# EAGLE board RF_PA (EAGLE 9.6.2)
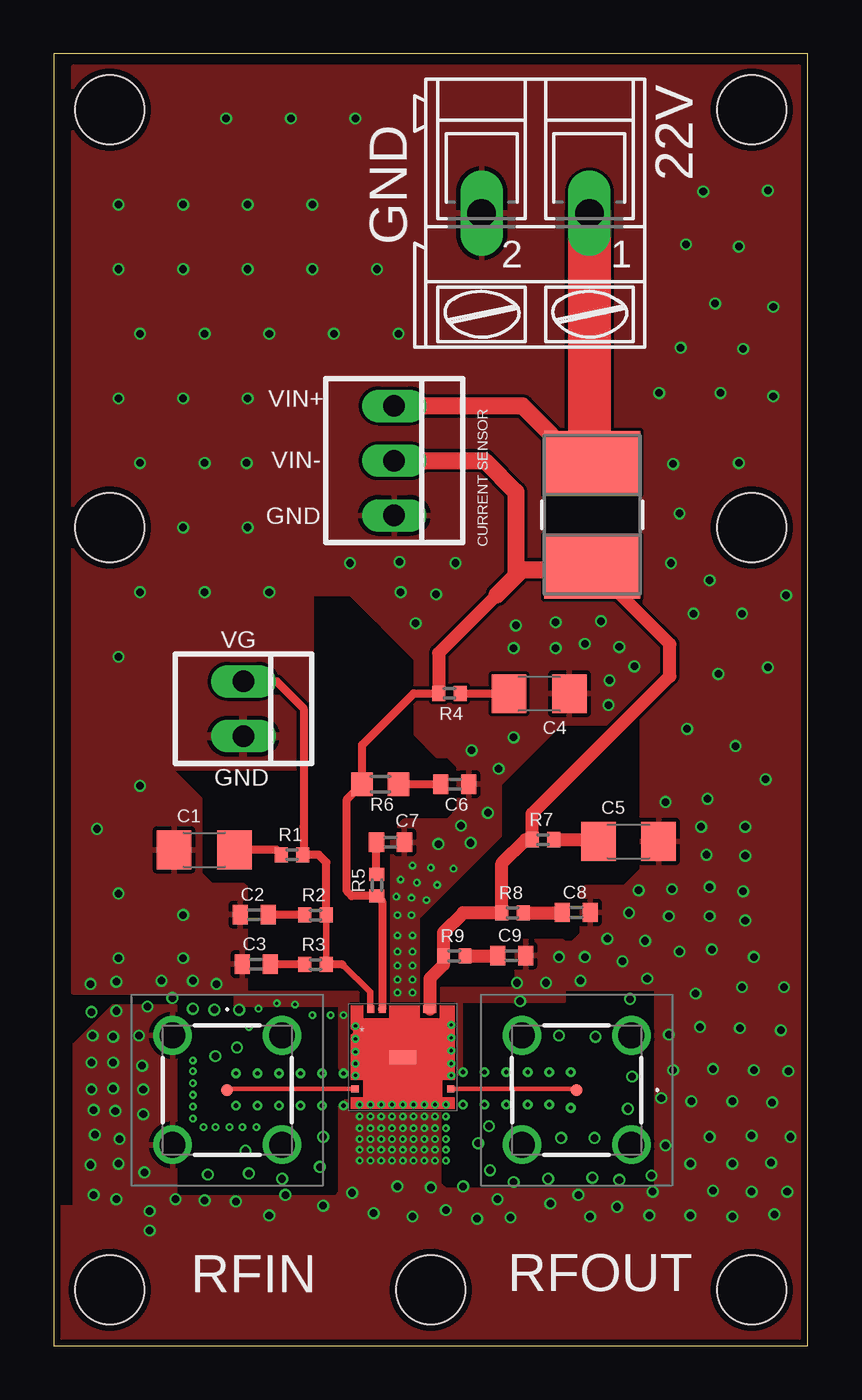
[diagram p0: board, top side]
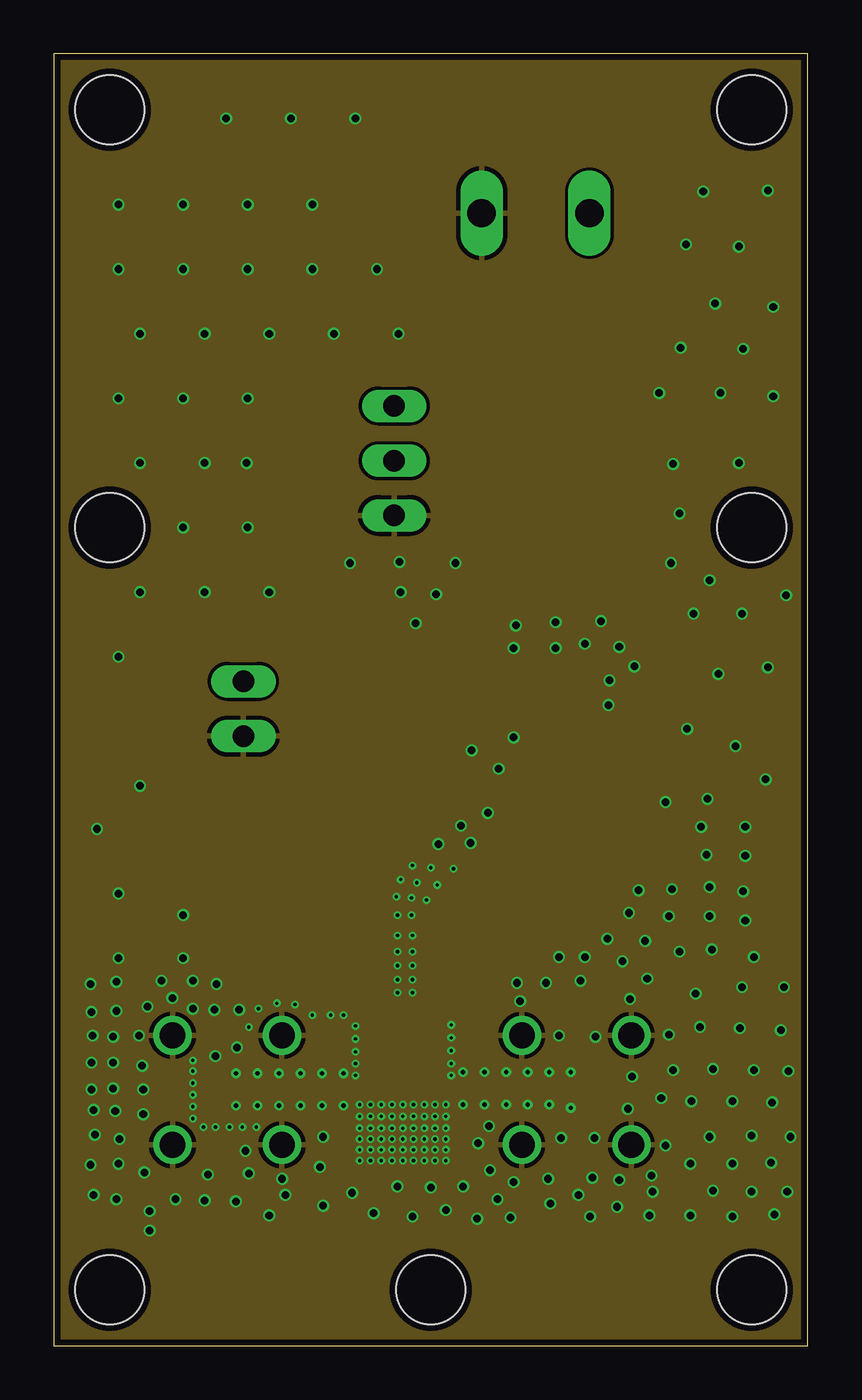
[diagram p1: board, inner layer Route2]
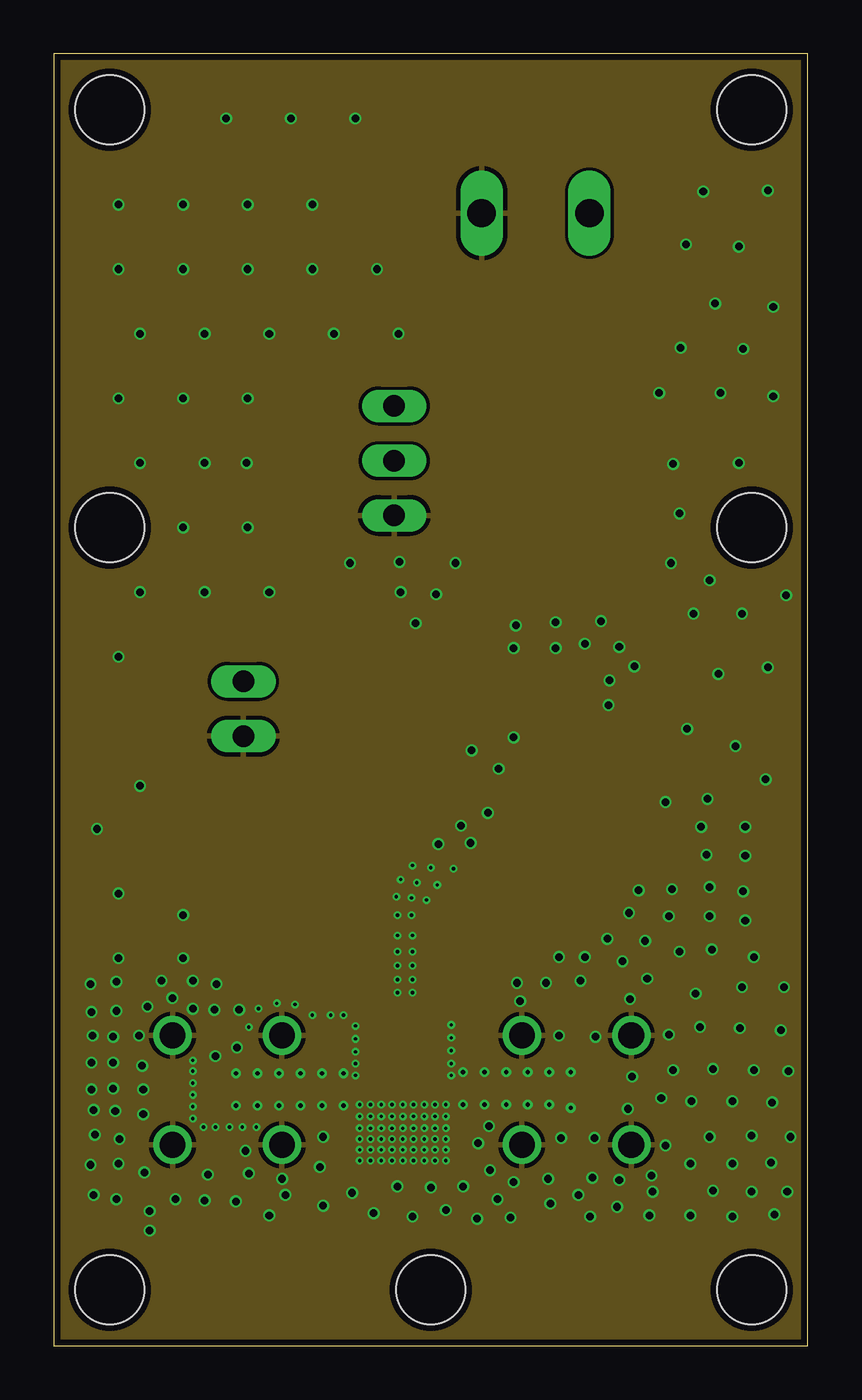
[diagram p2: board, inner layer Route15]
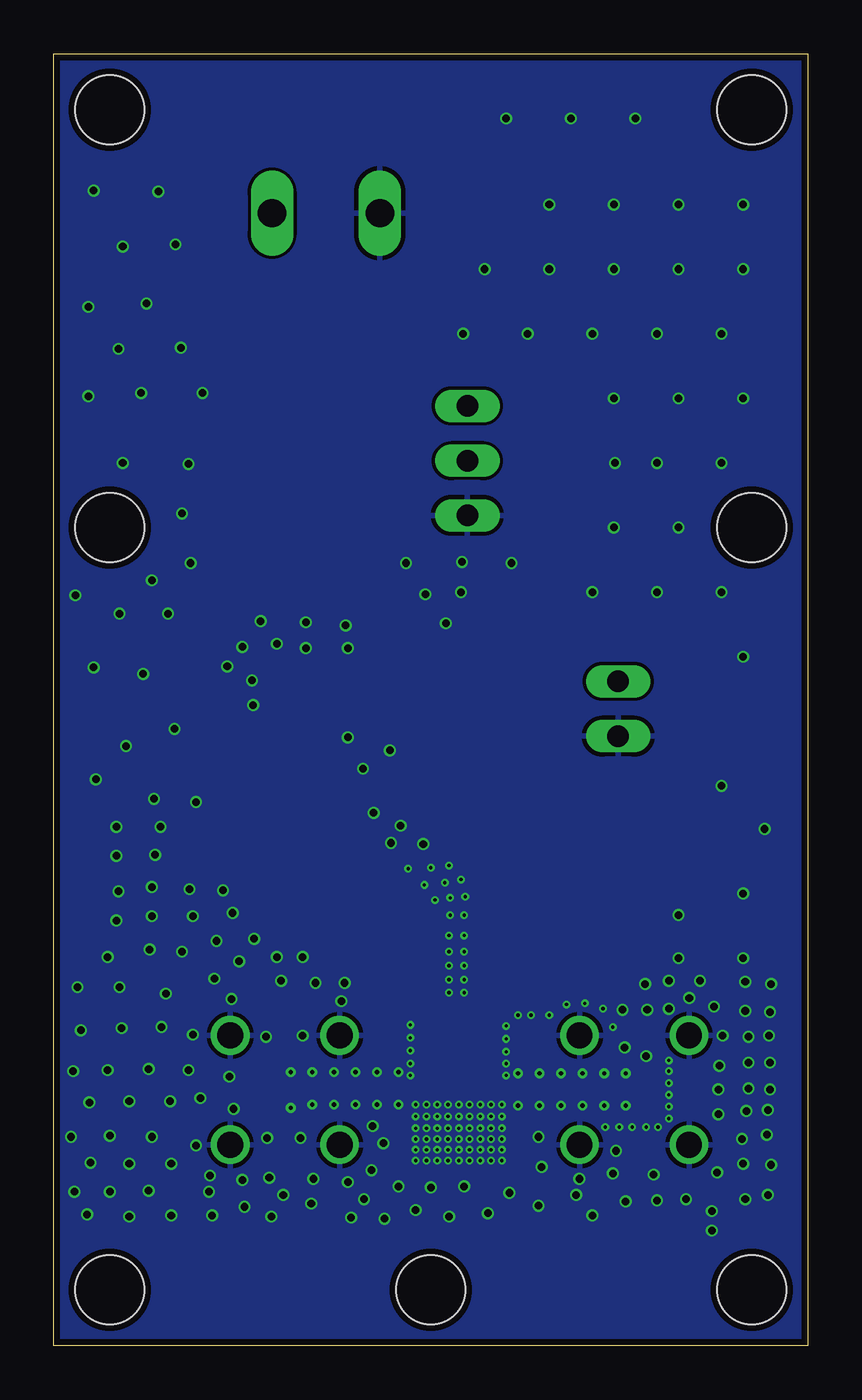
[diagram p3: board, bottom side, seen from below]

Size 35 x 60 mm. Coordinates in mm from the lower left corner, seen from the top.
Outline: 0,0 35,0 35,60 0,60 0,0
Copper layers (1+2*15+16): Top 0.035mm / dielectric 0.11mm / Route2 0.035mm / dielectric 1.2mm / Route15 0.035mm / dielectric 0.11mm / Bottom 0.035mm
Design rules "PCBWay_4L_100um-Track *": minimum track width 0.1mm, minimum drill 0.15mm, track to track 0.15mm, track to pad 0.1mm, pad to pad 0.1mm, via to via 0.1mm, smd to smd 0mil, copper to edge 0.3mm, drill to drill 10mil, minimum pad ring 6mil, minimum via ring 0.1mm, stop-mask expansion 2mil, vias tented up to drill 0.45mm, thermal gap 0.2mm
Holes 3.2 mm at 2.6,2.6 2.6,57.4 32.4,57.4 32.4,2.6 17.5,2.6 2.6,38 32.4,38
tRestrict: area 7.7,12.3 to 8.3,12.4; area 23.9,11.3 to 24.7,11.6

## Footprints (pad centres in the part's own frame; a part is rotated, then mirrored left to right if it is on the bottom)
AK300/2 = drill 1.321 long: 1 -2.515,0; 2 2.489,0
C1206 = smd 1.6 x 1.8: 1 -1.4,0; 2 1.4,0
C0402 = smd 0.7 x 0.9: 1 -0.65,0; 2 0.65,0
1420731211 = smd 0.559 x 0.559: 1 0,0 | drill 1.194 pad 1.791: 2 -2.54,2.54; 3 -2.54,-2.54; 4 2.54,-2.54; 5 2.54,2.54
R0402 = smd 0.6 x 0.7: 1 -0.5,0; 2 0.5,0
R0603 = smd 1 x 1.1: 1 -0.85,0; 2 0.85,0
WSL2816_VIS = smd 2.946 x 4.445: 1 -2.413,0; 2 2.413,0
QPA2962_B = smd 1.27 x 0.635: GND 0,0 | smd 0.345 x 0.32: RFIN -2.228,-1.465; RFOUT 2.228,-1.465 | smd 0.32 x 0.345: VD1 -0.96,2.228; VG -1.48,2.228 | smd 0.59 x 0.345: VD2 1.255,2.228
22-23-2021 = drill 1 long: 1 -1.27,0; 2 1.27,0
22-23-2031 = drill 1 long: 1 -2.54,0; 2 0,0; 3 2.54,0

## Placement (x,y rotation side)
22V  [AK300/2]  22.35,52.6 180 top
C1  10µF  [C1206]  6.98,23.03 0 top
C2  0.1µF  [C0402]  9.3,20.02 0 top
C3  0.1µF  [C0402]  9.39,17.72 0 top
C4  10µF  [C1206]  22.54,30.28 180 top
C5  10µF  [C1206]  26.68,23.42 0 top
C6  0.1µF  [C0402]  18.62,26.08 180 top
C7  0.1µF  [C0402]  15.63,23.38 180 top
C8  0.1µF  [C0402]  24.26,20.12 0 top
C9  0.1µF  [C0402]  21.25,18.12 0 top
J1  142-0731-211  [1420731211]  8.05,11.87 0 top
J2  142-0731-211  [1420731211]  24.27,11.87 270 top
R1  10R  [R0402]  11.06,22.8 0 top
R2  0R  [R0402]  12.15,20 0 top
R3  0R  [R0402]  12.14,17.7 0 top
R4  10R  [R0402]  18.37,30.3 180 top
R5  0R  [R0402]  15,21.38 270 top
R6  0R  [R0603]  15.16,26.08 180 top
R7  0R  [R0402]  22.71,23.5 0 top
R8  0R  [R0402]  21.3,20.1 0 top
R9  0R  [R0402]  18.59,18.1 0 top
R10  5mR  [WSL2816_VIS]  25,38.59 90 top
U$1  QPA2962_B  [QPA2962_B]  16.2,13.4 0 top
X2  22-23-2021  [22-23-2021]  8.8,29.58 270 top
X3  22-23-2031  [22-23-2031]  15.8,41.1 270 top

## Library data of the parts
22V = con-ptr500; OC_FARNELL: unknown; OC_NEWARK: unknown
C1-C9 = rcl; SPICEPREFIX: C
J1 J2 = 142-0731-211; DESCRIPTION: SMA Connector Jack, Female Socket 50 Ohms Through Hole Solder; HEIGHT: 9.8852mm; MANUFACTURER_NAME: Cinch Connectivity Solutions; MANUFACTURER_PART_NUMBER: 142-0731-211; MOUSER_PART_NUMBER: 530-142-0731-211; MOUSER_PRICE-STOCK: https://www.mouser.co.uk/ProductDetail/Johnson-Cinch-Connectivity-Solutions/142-0731-211?qs=HFfMDpzxxd0OVzI3hm9tuA%3D%3D
R1-R9 = rcl; SPICEPREFIX: R
R10 = My_Library_RADAR; COPYRIGHT: Copyright (C) 2025 Ultra Librarian. All rights reserved.; DATASHEET: https://www.vishay.com/doc?30100; DESCRIPTION: WSL-2816 .1 1% EH e3; MANUFACTURER_NAME: Vishay; MANUFACTURER_PART_NUMBER: WSL2816R1000FEH
U$1 = My_Library_RADAR
X2 = con-molex; MF: MOLEX; MPN: 22-23-2021; OC_FARNELL: 1462926; OC_NEWARK: 25C3832
X3 = con-molex; MF: MOLEX; MPN: 22-23-2031; OC_FARNELL: 1462950; OC_NEWARK: 30C0862

## Nets
GND: 22V.2 C1.1 C2.1 C3.1 C4.1 C5.2 C6.1 C7.1 C8.2 C9.2 J1.2 J1.3 J1.4 J1.5 J2.2 J2.3 J2.4 J2.5 U$1.GND X2.2 X3.3
N$1: C3.2 R3.1
N$2: J1.1 U$1.RFIN
N$3: C1.2 R1.1
N$4: C2.2 R2.1
N$5: C4.2 R4.1
N$6: C6.2 R6.1
N$7: C7.2 R5.1
N$8: J2.1 U$1.RFOUT
N$10: C5.1 R7.2
N$11: C8.1 R8.2
N$12: C9.1 R9.2
VD: 22V.1 R10.2 X3.1
VG: R1.2 R2.2 R3.2 U$1.VG X2.1
VIN_M: R4.2 R5.2 R6.2 R7.1 R8.1 R9.1 R10.1 U$1.VD1 U$1.VD2 X3.2

## Tracks (layer width: path | path; a pad name or v marks a point on that pad's centre or on a via)
GND  (via drill 0.15, 0.2 pad 0.45, 0.35)
  other vias: 8,57 11,57 14,57 3,53 6,53 9,53 12,53 15,50 12,50 9,50 6,50 3,50 4,47 7,47 10,47 13,47 16,47 3,44 6,44 9,44 4,41 7,41 8.95,41 6,38 9,38 4,35 7,35 10,35 3,32 4,26 2,24 3,21 6,20 6,18 3,18 15.95,16.4 16.65,16.4 16.65,17 15.95,17 15.95,17.65 15.95,18.3 15.95,19.05 16.65,17.65 16.65,18.3 16.65,19.05 15.95,20 16.6,20 15.9,20.85 16.1,21.65 16.65,22.3 16.6,20.8 16.85,21.5 17.5,22.2 17.8,21.4 18.55,22.15 17.3,20.7 17.85,23.3 19.35,23.35 18.9,24.15 20.15,24.75 20.65,26.8 19.4,27.65 21.35,28.25 25.75,29.75 25.8,30.9 26.95,31.55 26.25,32.45 24.65,32.6 23.3,32.4 21.35,32.4 21.45,33.45 23.3,33.6 25.4,33.65 21.5,16.85 22.85,16.85 23.45,18.05 24.45,16.95 24.65,18.05 25.7,18.9 26.7,20.1 27.15,21.15 28.7,21.2 28.55,19.95 27.45,18.8 26.4,17.85 27.55,17.05 30.45,21.3 30.45,19.95 30.55,18.4 29.05,18.3 30.3,22.8 30.05,24.1 28.4,25.25 32.1,24.1 32.1,22.75 32,21.1 32.1,19.75 32.5,18.05 30.15,53.6 33.15,53.65 29.35,51.15 31.8,51.05 30.7,48.4 33.4,48.25 29.1,46.35 32,46.3 30.95,44.25 28.1,44.25 33.4,44.1 28.75,40.95 31.8,41 30.35,25.4 33.05,26.3 31.65,27.85 29.4,28.65 30.85,31.2 33.15,31.5 29.7,34 31.95,34 34,34.85 30.45,35.55 28.65,36.35 29.05,38.65 13.75,36.35 16.05,36.4 18.65,36.35 16.1,35 17.75,34.9 16.8,33.55 13.45,15.35 12.85,15.35 12,15.35 11.2,15.85 10.35,15.9 9.5,15.65 9.05,14.8 6.45,13.25 6.45,12.75 6.45,12.2 6.45,11.65 6.45,11.1 6.45,10.55 6.95,10.15 7.5,10.15 8.15,10.15 8.75,10.15 9.4,10.15 16.2,10.65 16.2,10.1 16.2,9.6 16.2,9.1 16.2,8.6 15.7,10.65 15.2,10.65 14.7,10.65 14.2,10.65 15.7,10.1 15.2,10.1 14.7,10.1 14.2,10.1 15.7,9.6 15.2,9.6 14.7,9.6 14.7,9.1 15.2,9.1 15.7,9.1 14.2,9.6 14.2,9.1 14.2,8.6 14.7,8.6 15.7,8.6 15.2,8.6 16.7,10.65 17.2,10.65 17.7,10.65 18.2,10.65 16.7,10.1 16.7,9.6 17.2,10.1 17.7,10.1 17.2,9.6 17.7,9.6 18.2,10.1 18.2,9.6 16.7,9.1 17.2,9.1 17.7,9.1 18.2,9.1 16.7,8.6 17.2,8.6 17.7,8.6 18.2,8.6 14.2,11.2 14.7,11.2 15.2,11.2 15.7,11.2 16.2,11.2 16.7,11.2 17.2,11.2 17.7,11.2 18.2,11.2 14,14.85 14,14.25 14,13.65 14,13.1 14,12.55 18.45,14.9 18.45,14.3 18.45,13.7 18.45,13.1 18.45,12.55 8.6,15.6 7.45,15.6 6.45,15.65 4.35,15.75 5,16.95 6.45,16.95 7.55,16.8 2.9,16.9 2.9,15.55 1.7,16.8 1.75,15.5 1.8,14.4 2.75,14.35 3.95,14.4 2.75,13.15 1.75,13.15 4.1,13 1.75,11.9 2.75,11.95 4.15,11.9 1.85,10.95 2.85,10.9 4.15,10.75 1.9,9.8 3.05,9.6 4.2,8.05 3,8.45 1.7,8.4 2.9,6.8 1.85,7 8.45,12.65 9.45,12.65 10.45,12.65 11.45,12.65 12.45,12.65 13.45,12.65 8.45,11.15 9.45,11.15 10.45,11.15 11.45,11.15 12.45,11.15 13.45,11.15 24,12.7 23,12.7 22,12.7 21,12.7 20,12.7 19,12.7 19,11.2 20,11.2 21,11.2 22,11.2 23,11.2 24,11.05 7.5,13.45 8.5,13.85 4.45,6.25 5.65,6.8 4.45,5.35 7,6.75 7.15,7.95 9.05,8 8.45,6.7 10.75,7 10,6.05 12.5,6.5 12.35,8.3 12.5,9.7 13.85,7.1 14.85,6.15 15.95,7.4 16.65,6 17.5,7.35 18.2,6.3 19.65,5.9 19,7.4 21.2,5.95 20.6,6.8 21.35,7.6 20.25,8.15 19.7,9.4 20.2,10.2 22.95,7.75 23.55,9.65 25.1,9.65 25,7.8 23.05,6.6 24.9,6 24.35,7 26.15,6.45 26.25,7.7 27.65,6.05 27.8,7.15 28.4,9.3 27.75,7.9 26.65,11 10.6,7.75 8.9,9.05 5.5,16.15 29.55,6.05 31.5,6 33.45,6.1 30.6,7.2 32.4,7.15 34.05,7.15 29.55,8.45 31.5,8.45 33.3,8.5 30.45,9.7 32.4,9.75 34.2,9.7 28.2,11.5 26.75,16.1 21.65,16 23.45,14.4 25.15,14.35 29.6,11.35 31.5,11.35 33.35,11.3 28.55,14.45 26.85,12.5 28.75,12.8 30.6,12.85 32.5,12.8 34.1,12.75 33.9,16.65 31.95,16.65 29.8,16.35 30,14.8 31.85,14.75 33.75,14.65
  pour Top: 0.9,16.4 8.9,16.4 8.9,21.3 8.8,21.4 7.3,21.4 6.8,21.9 6.8,25.4 1.9,30.3 1.9,32 4.8,34.9 13.8,34.9 16.8,31.9 16.8,28.4 17.8,27.4 18.3,27.4 18.8,26.9 18.8,24.9 18.3,24.4 16.3,24.4 15.7,23.8 15.7,15.4 14.3,15.4 14.3,15.9 13.3,15.9 13.3,12.9 13.7,12.5 14.3,12.5 14.5,12.3 14.5,11.7 14.2,11.4 13.6,11.4 13.3,11.1 13.3,7.1 13.1,6.9 2.5,6.9 0.98,5.38 29.3,5.38 29.3,7.23 18.17,7.23 17.9,7.5 17.9,12.3 18.1,12.5 18.7,12.5 18.9,12.7 18.9,15.9 18.7,16.1 18.3,16.1 18.1,15.9 18.1,15.1 17.9,14.9 17.1,14.9 16.9,15.1 16.9,19.9 20.7,23.7 20.7,26.1 23.5,28.9 25.9,28.9 26.7,29.7 27.3,29.7 27.3,22.1 26.5,21.3 24.7,21.3 24.5,21.1 24.5,19.1 24.1,18.7 23.7,18.7 23.6,18.8 21.5,18.8 21.5,16.6 34.7,16.6 34.7,59.3 34.6,59.4 0.9,59.4
  pour Top: 8.42,15.8 14.1,15.8 14.1,16.4 8.42,16.4
  pour Top: 1.5,36.8 1.5,26.9 11.9,26.9 11.9,36.8
  pour Top: 27.9,16.9 27.9,5.1 34.7,5.1 34.7,16.9
  pour Top: 0.9,14 0.9,5 1,4.9 5.7,4.9 5.7,15.8 2.7,15.8
  pour Route2: 0,60 35,60 35,0 0,0
  pour Route15: 0,60 0,0 35,0 35,60
  pour Bottom: 0,60 0,0 35,0 35,60
  pour Top: 0,6.5 34.42,6.5 35,5.92 35,0 0.57,0 0,0.57
  pour Top: 18.02,16 23.7,16 23.7,16.6 18.02,16.6
N$1
  Top 0.37: R3.1 10.06,17.7 C3.2
N$2
  Top 0.204: U$1.RFIN 8.12,11.94 J1.1
N$3
  Top 0.37: R1.1 10.33,23.03 C1.2
N$4
  Top 0.37: R2.1 9.97,20 C2.2
N$5
  Top 0.37: R4.1 21.12,30.3 C4.2
N$6
  Top 0.37: R6.1 C6.2
N$7
  Top 0.37: R5.1 14.98,21.9 C7.2
N$8
  Top 0.204: U$1.RFOUT 24.2,11.94 J2.1
N$10
  Top 0.6: C5.1 25.2,23.5 R7.2
N$11
  Top 0.6: R8.2 23.59,20.1 C8.1
N$12
  Top 0.6: C9.1 20.58,18.1 R9.2
VD
  Top 0.8: R10.2 24.4,41 21.76,43.64 X3.1 15.84,43.6
  Top 2: 22V.1 24.86,40.89 25.2,40.55 25.2,40.8 R10.2
VG
  Top 0.3: R2.2 R3.2 | 13.4,17.7 14.68,16.42 14.68,15.67 U$1.VG
  Top 0.37: 13.4,17.7 R3.2 | R2.2 12.65,22.45 12.3,22.8 R1.2 11.6,22.84 11.6,24.1 11.6,29.6 10.35,30.85 X2.1
VIN_M
  Top 0.37: R4.2 16.7,30.3 14.31,27.91 R6.2 13.6,25.37 13.6,21.1 13.82,20.88 R5.2 15.24,20.64 U$1.VD1
  Top 0.6: 25.88,35.3 25.14,36.04 R10.1 28.6,32.58 28.6,31.1 22.21,24.71 R7.1 21.9,23.5 20.8,22.4 R8.1 19,20.1 18.09,19.19 R9.1 18.09,17.69 17.45,17.05 17.45,16 17.45,15.66 U$1.VD2 | R4.2 17.87,32.17 20.58,34.88
  Top 0.8: X3.2 20,41.1 21.45,39.65 21.45,35.75 | 20.58,34.88 21.45,35.75 | 21.45,35.75 21.74,36.04 25.14,36.04

## Text on the board
tNames: GND | VIN+ | VIN- | GND | CURRENT SENSOR | VG | GND | RFIN | RFOUT